# EAGLE board power (EAGLE 9.6.1)

Size 160 x 100 mm. Coordinates in mm from the lower left corner, seen from the top.
Outline: 0,0 160,0 160,100 0,100 0,0
Copper layers (1*16): Top 0.035mm / dielectric 1.5mm / Bottom 0.035mm
Design rules "CNC": minimum track width 6mil, minimum drill 0.35mm, track to track 0.2mm, track to pad 0.2mm, pad to pad 0.2mm, via to via 0.2mm, smd to smd 0.2mm, copper to edge 40mil, drill to drill 6mil, minimum pad ring 10mil, minimum via ring 8mil, stop-mask expansion 0.1mm, vias tented up to drill 0.1mm, thermal gap 0.1mm
Net classes: 0 default: width 0.7 mm, drill 0.8 mm, clearance 0.2 mm

## Footprints (pad centres in the part's own frame; a part is rotated, then mirrored left to right if it is on the bottom)
C1206 = smd 1.6 x 1.8: 1 -1.4,0; 2 1.4,0
C0805 = smd 1.3 x 1.5: 1 -0.95,0; 2 0.95,0
DO41-10 = drill 1.118: A 5.08,0; C -5.08,0
SOT95P270X145-5N = smd 1.4 x 0.6: 1 -1.25,0.95; 2 -1.25,0; 3 -1.25,-0.95; 4 1.25,-0.95; 5 1.25,0.95
SOT96P240X100-3N = smd 1.1 x 0.65: 1 -1.05,0.96; 2 -1.05,-0.96; 3 1.05,0
JST_S2B-PH-SM4-TB(LF)(SN) = smd 1 x 3.5: 1 -1,0; 2 1,0 | smd 1.5 x 3.4: S1 -3.35,-5.75; S2 3.35,-5.75
PJ-002AH-SMT-TR = smd 2.8 x 2.4: 1 11.1,10.2; 2 5,10.2; 3 5,-1.2; 4 11.1,-1.2 | drill 1.8 pad 2.7: 5 9.5,4.5 | drill 1.6 pad 2.4: 6 5,4.5
1X04 = drill 1.016 long: 1 -3.81,0; 2 -1.27,0; 3 1.27,0; 4 3.81,0
1206 = smd 1.6 x 1.803: A -1.422,0; C 1.422,0
R1206 = smd 1.6 x 1.803: 1 -1.422,0; 2 1.422,0

## Placement (x,y rotation side)
C26  4.7uF  [C1206]  -38.1,19.05 0 top  (outside the outline)
C27  4.7uF  [C1206]  -16.51,27.94 0 top  (outside the outline)
C30  1uF  [C0805]  -33.02,27.94 0 top  (outside the outline)
D1  1N4942  [DO41-10]  -19.05,20.32 0 top  (outside the outline)
IC1  MCP73832T-2ACI_OT  [SOT95P270X145-5N]  -22.86,39.37 0 top  (outside the outline)
IC3  DMP1045U-7  [SOT96P240X100-3N]  -19.05,43.18 0 top  (outside the outline)
J4  S2B-PH-SM4  [JST_S2B-PH-SM4-TB(LF)(SN)]  -38.1,11.43 0 top  (outside the outline)
J6  PJ-002AH-SMT-TR  [PJ-002AH-SMT-TR]  -27.94,2.54 0 top  (outside the outline)
JP1  [1X04]  -19.05,33.02 0 top  (outside the outline)
LED2  [1206]  -29.21,33.02 0 top  (outside the outline)
R12  0  [R1206]  -27.94,27.94 0 top  (outside the outline)
R13  470ohm  [R1206]  -31.75,19.05 0 top  (outside the outline)
R14  100K  [R1206]  -22.86,27.94 0 top  (outside the outline)

## Library data of the parts
C26 C27 C30 = CommonParts; SPICEPREFIX: C
D1 = diode
IC1 = MouserUseful; DESCRIPTION: Battery Charger Lithium-Ion, Lithium-Polymer; HEIGHT: 1.45mm; MANUFACTURER_NAME: Microchip; MANUFACTURER_PART_NUMBER: MCP73832T-2ACI/OT; MOUSER_PART_NUMBER: 579-MCP73832T-2ACIOT; MOUSER_PRICE-STOCK: https://www.mouser.com/Search/Refine.aspx?Keyword=579-MCP73832T-2ACIOT
IC3 = MouserUseful; DESCRIPTION: P-Channel Enhancement MOSFET SOT-23 Diodes Inc DMP1045U-7 P-channel MOSFET Transistor, 5.2 A, -12 V, 3-Pin SOT23; HEIGHT: 1mm; MANUFACTURER_NAME: Diodes Inc.; MANUFACTURER_PART_NUMBER: DMP1045U-7; MOUSER_PART_NUMBER: 621-DMP1045U-7; MOUSER_PRICE-STOCK: https://www.mouser.com/Search/Refine.aspx?Keyword=621-DMP1045U-7
J4 = CommonParts; DESCRIPTION: PH Series 2 Position 2 mm Pitch Surface Mount Side Entry Shrouded Header; DIGI-KEY_PART_NUMBER: 455-1749-1-ND; DIGI-KEY_PURCHASE_URL: https://www.digikey.com/product-detail/en/jst-sales-america-inc/S2B-PH-SM4-TB_LF__SN_/455-1749-1-ND/926846?utm_source=snapeda&utm_medium=aggregator&utm_campaign=symbol; MF: JST Sales; MP: S2B-PH-SM4-TB_LF__SN_; PACKAGE: None
J6 = CommonParts; DESCRIPTION: DC Power Connectors Power Jacks; HEIGHT: mm; MANUFACTURER_NAME: CUI; MANUFACTURER_PART_NUMBER: PJ-002AH-SMT-TR; MOUSER_PART_NUMBER: 490-PJ-002AH-SMT-TR; MOUSER_PRICE-STOCK: https://www.mouser.com/Search/Refine.aspx?Keyword=490-PJ-002AH-SMT-TR
JP1 = pinhead
LED2 R12-R14 = CommonParts

## Nets
3.3V: JP1.4
5V: C27.1 D1.A IC1.4 IC3.1 LED2.A R14.1
12V: C30.1 D1.C IC3.3 J6.1 J6.2 JP1.1
GNDA: C26.1 C27.2 C30.2 IC1.2 J4.2 J4.S1 J4.S2 J6.3 J6.4 JP1.2 JP1.3 R12.2 R14.2
N$10: LED2.C R13.2
PROG: IC1.5 R12.1
STAT: IC1.1 R13.1
VBAT: C26.2 IC1.3 IC3.2 J4.1

## Tracks (layer width: path | path; a pad name or v marks a point on that pad's centre or on a via)
5V  (5 unrouted)
12V  (5 unrouted)
GNDA  (12 unrouted)
N$10  (1 unrouted)
PROG  (1 unrouted)
STAT  (1 unrouted)
VBAT  (3 unrouted)